# Altium PCB Beetech NanoEvery.PcbDoc
Units mm, origin at the board's own origin, x right, y up, seen from the top; angles counter-clockwise.
Board outline 90 x 57 mm, 2 copper layers (Top Layer, Bottom Layer), stack 1.671 mm thick; 33 components, 41 nets, 183 pads, 7 vias.
Unrouted connection lines stored in the file: 254.
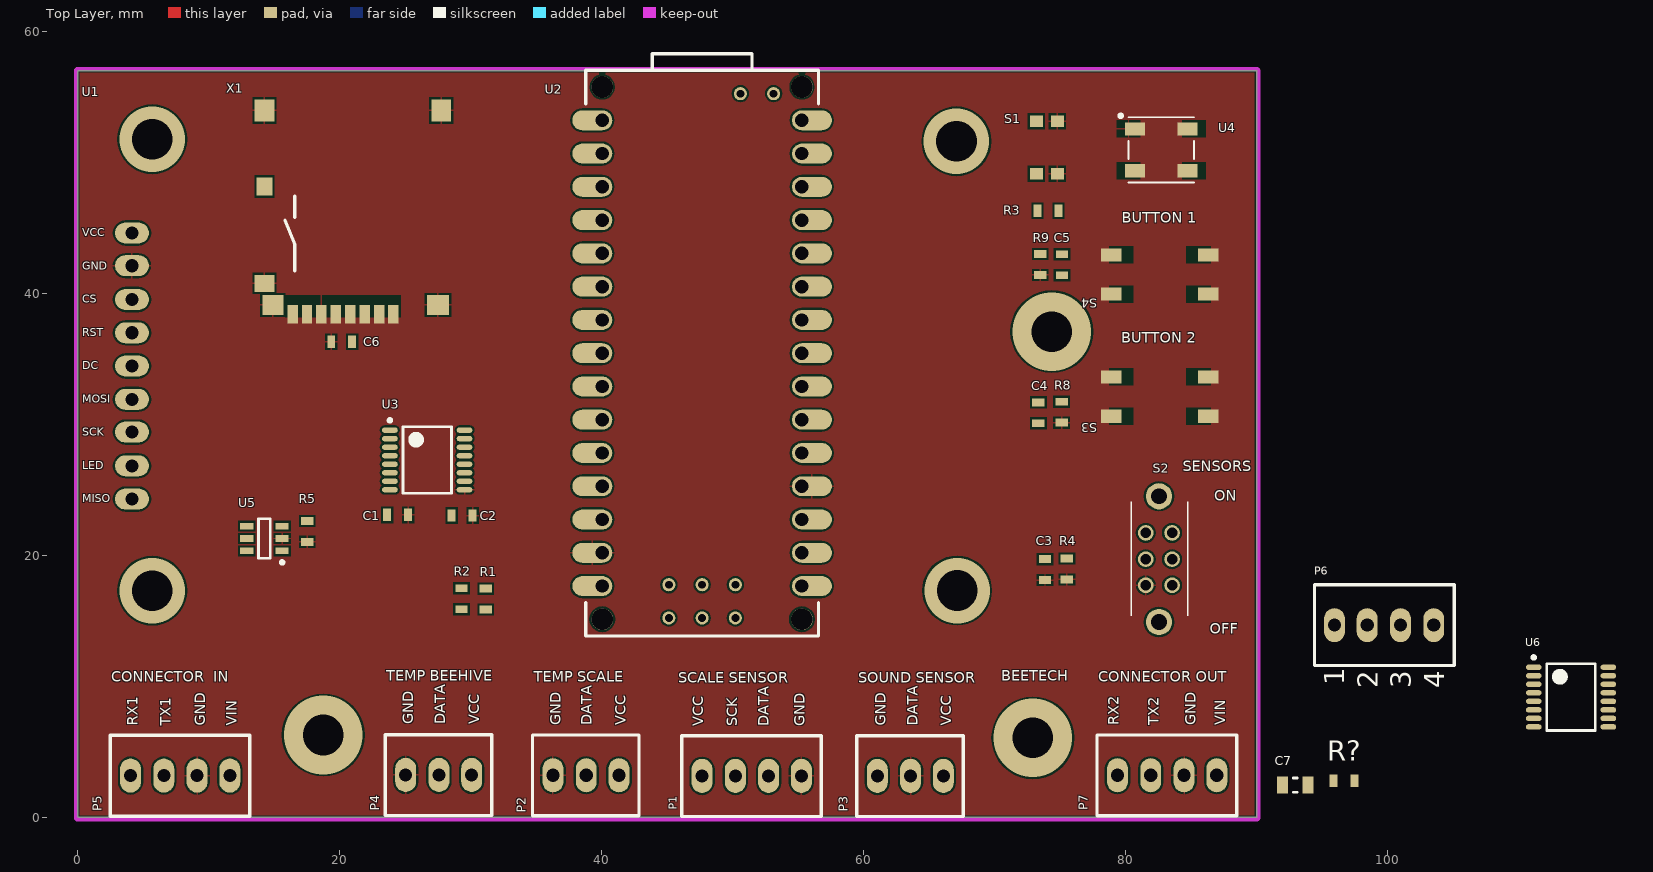
[diagram p0: Top Layer view]
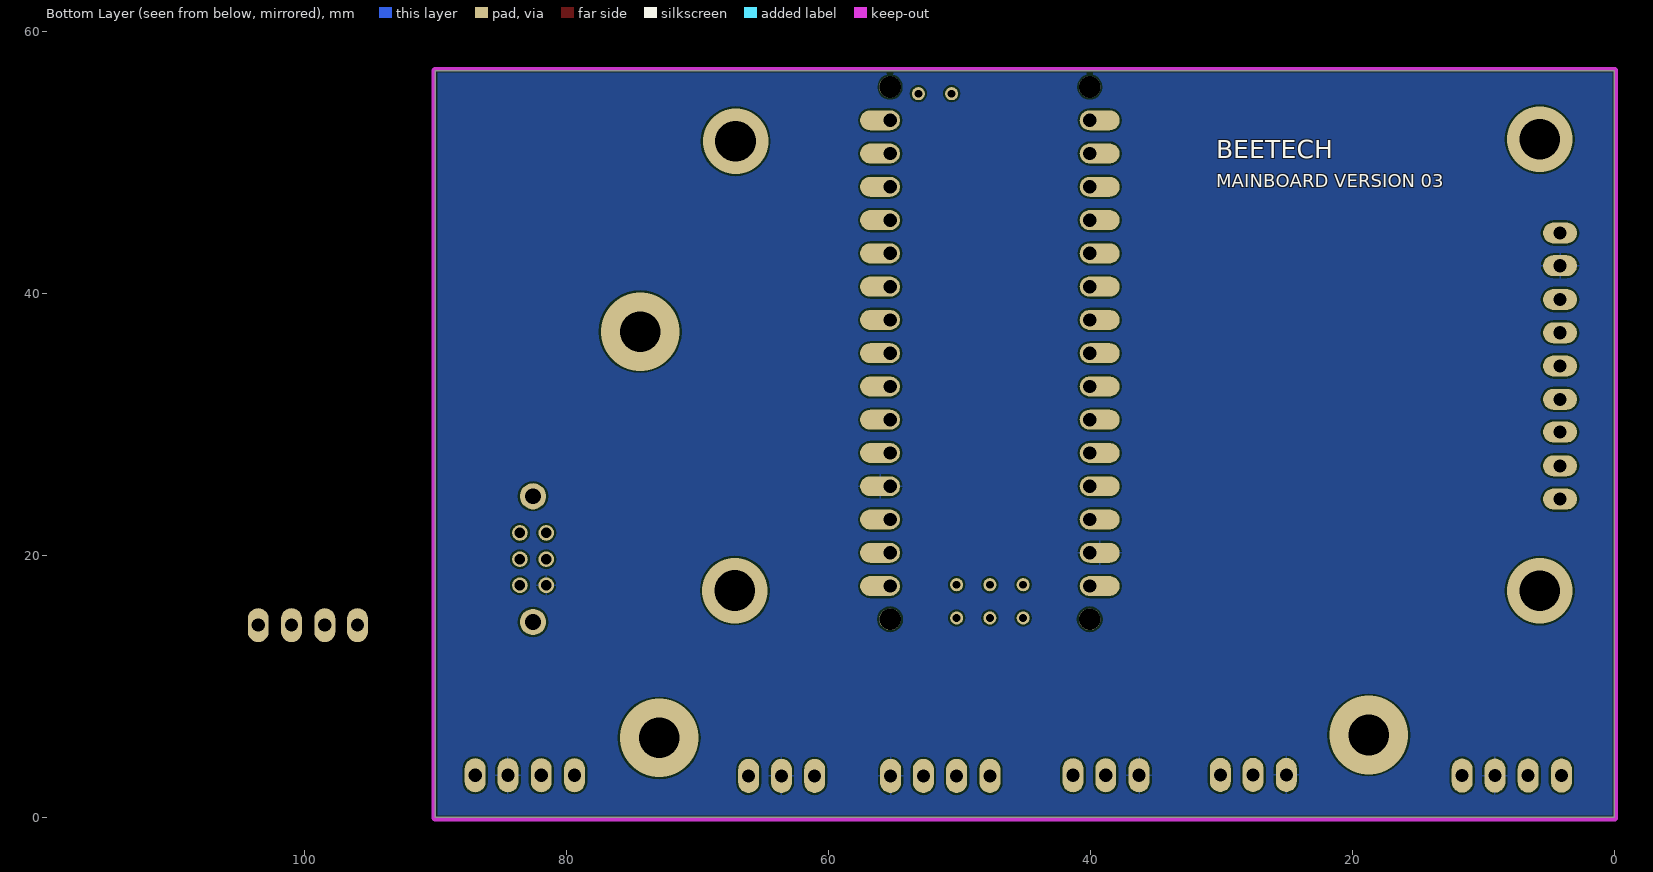
[diagram p1: Bottom Layer view, seen from below]

## Layer stack, top to bottom
Top Solder: solder mask 0.0102, Solder Resist, Dk 3.5
Top Layer: signal copper 0.0356
Dielectric1: core 1.6, FR-4, Dk 4.8
Bottom Layer: signal copper 0.0356
Bottom Solder: solder mask 0.0102, Solder Resist, Dk 3.5

## Board outline
0,0 90,0 90,57 0,57

## Design rules (kind name [scope] priority, off if disabled: settings)
Clearance Clearance_1 [InNamedPolygon('SW_L01_P024')] p1: gap=0.254 ignorepadtopadclearanceinfootprint=FALSE except(0: Arc-Hole Track-Hole SMDPad-Hole THPad-Hole Via-Hole Fill-Hole Poly-Hole Region-Hole Text-Hole)
Clearance [All] p2: gap=0.15 ignorepadtopadclearanceinfootprint=FALSE
ComponentClearance [All] p1: gap=0.001 collisioncheckmode=3 verticalgap=0.254 showdistances=FALSE
FabricationTestPointUsage [All] p1 off: valid=0 allowmultiple=FALSE
FabricationTestpoint [All] p1 off: side=3 testpointundercomponent=TRUE minsize=1.016 maxsize=2.54 preferedsize=1.524 minholesize=0 maxholesize=1.016 preferedholesize=0.813 testpointgrid=0.025 allowsidetop=TRUE allowsidebottom=TRUE usegrid=TRUE gridtolerance=0
HoleSize [All] p1: absolutevalues=TRUE maxlimit=6 minlimit=0.025 maxpercent=80.000 minpercent=20.000
HoleToHoleClearance [All] p1: gap=0 allowstackedmicrovias=TRUE
MinimumSolderMaskSliver [All] p1: minsoldermaskwidth=0
PolygonConnect PolygonConnect_14 [All vs IsNamedPolygon('GND_L01_P041')] p1: connectstyle=Relief reliefconductorwidth=0.15 reliefentries=4 polygonreliefangle="90 Angle" airgapwidth=0.15
PolygonConnect V_BAT_L01_P036 [All vs IsNamedPolygon('V_BAT_L01_P036')] p2: connectstyle=Direct reliefconductorwidth=0.254 reliefentries=4 polygonreliefangle="90 Angle" airgapwidth=0.254
PolygonConnect V_BAT2 [All vs IsNamedPolygon('V_BAT2_L01_P004')] p3: connectstyle=Direct reliefconductorwidth=0.254 reliefentries=4 polygonreliefangle="90 Angle" airgapwidth=0.254
PolygonConnect V_BAT [All vs IsNamedPolygon('V_BAT_L01_P010')] p4: connectstyle=Direct reliefconductorwidth=0.254 reliefentries=4 polygonreliefangle="90 Angle" airgapwidth=0.254
PolygonConnect V_SYS2 [All vs IsNamedPolygon('V_SYS2_L01_P012')] p5: connectstyle=Direct reliefconductorwidth=0.254 reliefentries=4 polygonreliefangle="90 Angle" airgapwidth=0.254
PolygonConnect +3.3b_uBlox [All vs IsNamedPolygon('+3.3V_UBLOX_L01_P014')] p6: connectstyle=Direct reliefconductorwidth=0.254 reliefentries=4 polygonreliefangle="90 Angle" airgapwidth=0.254
PolygonConnect V_LIPO_SYS_L01_P016 [All vs IsNamedPolygon('V_LIPO_SYS_L01_P016')] p7: connectstyle=Direct reliefconductorwidth=0.254 reliefentries=4 polygonreliefangle="90 Angle" airgapwidth=0.254
PolygonConnect V_LIPO_SYS_L01_P020 [All vs IsNamedPolygon('V_LIPO_SYS_L02_P020')] p8: connectstyle=Direct reliefconductorwidth=0.254 reliefentries=4 polygonreliefangle="90 Angle" airgapwidth=0.254
PolygonConnect V_SYS_L02_P024 [All vs IsNamedPolygon('V_SYS_L02_P024')] p9: connectstyle=Direct reliefconductorwidth=0.254 reliefentries=4 polygonreliefangle="90 Angle" airgapwidth=0.254
PolygonConnect VCC_USB_5.0V_L01_P026 [All vs IsNamedPolygon('VCC_USB_5.0V_L01_P026')] p10: connectstyle=Direct reliefconductorwidth=0.254 reliefentries=4 polygonreliefangle="90 Angle" airgapwidth=0.254
PolygonConnect SW [All vs IsNamedPolygon('SW_L01_P008')] p11: connectstyle=Direct reliefconductorwidth=0.254 reliefentries=4 polygonreliefangle="90 Angle" airgapwidth=0.254
PolygonConnect [All] p12: connectstyle=Relief reliefconductorwidth=0.15 reliefentries=4 polygonreliefangle="90 Angle" airgapwidth=0.15
RoutingVias [All] p1: holewidth=0.3 width=0.5 viastyle="Through Hole" minholewidth=0.2 minwidth=0.3 maxholewidth=1.2 maxwidth=2 useviatemplates=TRUE viatemplateguid#1={68F519FB-439D-452A-8ACF-2DE296BA9197} viatemplateguid#2={5ED9683F-E5DF-4E78-BDB1-49E541A8EC46} viatemplateguid#3={FAFF2F81-81C9-46E2-9D3D-D8AEF9417303} viatemplateguid#4={175E6F9D-763D-42D4-A59E-C21ACC7DA2E1} viatemplatename#1=v50h30m0mx0 viatemplatename#2=v50h30m50mx0 viatemplatename#3=v50h20 viatemplatename#4=v50h20mx0
SilkToSilkClearance [All] p1: silktosilkclearance=0.152
SilkToSolderMaskClearance [IsPad] p1: minsilkscreentomaskgap=0.127 clearancetoexposedcopper=TRUE
SolderMaskExpansion [All] p1: expansion=0.102 istentingtop=FALSE
Width [All] p1: maxlimit=5.08 minlimit=0.01 preferedwidth=0.305 minimp=50.000000 maximp=50.000000 favimp=50.000000
22 further rules are at their usual default settings.

## Components (designator, comment, footprint, x,y, rotation, side; value= is the part's Value field where it differs from the comment)
C1 "100nF 0603_1" "CAP 0603" 24.424,23.106 r180 top value=100nF
C2 "100nF 0603_1" "CAP 0603" 29.349,23.055 r180 top value=100nF
C3 "100nF 0603" "CAP 0603" 73.85,18.925 r270 top value=100nF
C4 "100nF 0603" "CAP 0603" 73.348,30.895 r90 top value=100nF
C5 "100nF 0603" "CAP 0603" 75.149,42.202 r90 top value=100nF
C6 "10uF 0603" "CAP 0603" 20.151,36.325 r0 top value=10uF
C7 "100nF 0805" "CAP 0805" 92.957,2.464 r0 top value=1uF
P1 "4-Pin Right Angle Housing" "4PIN - RND 205-EK254-2.54-04P" 55.25,3.175 r270 top
P2 "3-Pin Right Angle Housing" "3PIN - RND 205-EK254-2.54-03P" 41.325,3.225 r270 top
P3 "3-Pin Right Angle Housing" "3PIN - RND 205-EK254-2.54-03P" 66.09,3.175 r270 top
P4 "3-Pin Right Angle Housing" "3PIN - RND 205-EK254-2.54-03P" 30.078,3.25 r270 top
P5 "4-Pin Right Angle Housing" "4PIN - RND 205-EK254-2.54-04P" 11.615,3.2 r270 top
P6 "4-Pin Right Angle Housing" "4PIN - RND 205-EK254-2.54-04P" 95.95,14.681 r90 top
P7 "4-Pin Right Angle Housing" "4PIN - RND 205-EK254-2.54-04P" 86.965,3.225 r270 top
R1 "4.7k Ohm 0603" "RES 0603 FOOTPRINT" 31.15,16.675 r270 top value=4.7k
R2 "4.7k Ohm 0603" "RES 0603 FOOTPRINT" 29.3,16.7 r270 top value=4.7k
R3 "470 Ohm 0603" "RES 0603 FOOTPRINT" 74.075,46.325 r0 top value=470
R4 "1k Ohm 0603" "RES 0603 FOOTPRINT" 75.525,18.978 r90 top value=1k
R5 "47k Ohm 0603" "RES 0603 FOOTPRINT" 17.526,21.844 r90 top value=47k
R8 "10k Ohm 0603" "RES 0603 FOOTPRINT" 75.123,30.945 r90 top value=10k
R9 "10k Ohm 0603" "RES 0603 FOOTPRINT" 73.489,42.22 r90 top value=10k
R? "20k Ohm 0603" "RES 0603 FOOTPRINT" 96.672,2.794 r0 top value=20k
S1 "Taster Print_SMD_2" "Taster Print - SMD - KMR241G LFS" 73.989,51.15 r270 top
S2 "Schiebeschalter EG2207" "Schiebeschalter on-on 2 P, EG2207" 82.55,19.725 r90 top
S3 "Taster Print_SMD_3" "Taster Print - SMD - PTS647SM70SMTR2LFS" 82.616,32.134 r180 top
S4 "Taster Print_SMD_3" "Taster Print - SMD - PTS647SM70SMTR2LFS" 82.616,41.456 r180 top
U1 "TFT 2.2 SPI 240x320" "TFT 2.2 SPI 240x320" 4.14,44.628 r0 top locked
U2 "Arduino Nano Every" "Arduino Nano Every" 38.78,57.04 r270 top locked
U3 "TXB0106" TSSOP-16L 26.685,27.297 r0 top
U4 "neoPixel" "neoPixel 5050 adafruit 1655" 82.725,50.975 r180 top
U5 "TPS22917DBVT" "SOT23 - 6" 14.255,21.3 r180 top
U6 "TXB0106" TSSOP-16L 114.014,9.195 r0 top
X1 "SD micro Card Holder_2" "SD Card Holder - micro - 2 - sd Card inserted" 15.005,54.83 r0 top locked

## Footprints (in the part's own frame and the unit in brackets; to place one, negate y for a bottom-side part, rotate by r counter-clockwise, add the part's x,y. Pads: shape width x height; smd on the part's side, far side on the other; paste and mask are expansions set on the pad)
"3PIN - RND 205-EK254-2.54-03P" [mm] "RND 205-EK254-2.54-03P"
  oval 2.6x1.6 hole 1: 1(0,0) 2(0,-2.5) 3(0,-5.04)
  silkscreen extent -3.07,-6.6 3.1,1.52, body extent -3.1,-6.55 3.1,1.53, height 8.51
"4PIN - RND 205-EK254-2.54-04P" [mm] "RND 205-EK254-2.54-04P"
  oval 2.6x1.6 hole 1: 1(0,0) 2(0,-2.5) 3(0,-5.04) 4(0,-7.58)
  silkscreen extent -3.07,-9.14 3.1,1.52, body extent -3.1,-9.1 3.1,1.52, height 8.51
"Arduino Nano Every" [mil] "Arduino Nano Every"
  oval 60x120 hole 40 copper offset 0,-30: 1(150,50) 2(250,50) 3(350,50) 4(450,50) 5(550,50) 6(650,50) 7(750,50) 8(850,50) 9(950,50) 10(1050,50) 11(1150,50) 12(1250,50) 13(1350,50) 14(1450,50) 15(1550,50)
  oval 60x120 hole 40 copper offset 0,30: 16(1550,650) 16(1550,650) 17(1450,650) 18(1350,650) 19(1250,650) 20(1150,650) 21(1050,650) 22(950,650) 23(850,650) 24(750,650) 25(650,650) 26(550,650) 27(450,650) 28(350,650) 29(250,650) 30(150,650)
  round 39.37 hole 23.62: 50(70,565) 51(70,465) 61(1545.98,250) 62(1645.98,250) 63(1545.98,350) 64(1645.98,350) 65(1545.98,450) 66(1645.98,450)
  round 65 hole 65 unplated: MH1(50,650) MH2(50,50) MH3(1650,50) MH4(1650,650)
  silkscreen extent -50,0 1700,700, body extent -40,0 1700,700, height 136
"CAP 0603" [mm] "CAP 0603"
  rect 0.6x0.95 smd: 1(-0.8,0) 2(0.8,0)
  body extent -0.8,-0.4 0.8,0.4, height 0.8
"CAP 0805" [mm] "CAP 0805"
  rect 0.85x1.3 smd: 1(-0.975,0) 2(0.975,0)
  silkscreen extent -0.15,-0.55 0.15,0.55, body extent -1,-0.63 1,0.63, height 0.65
"neoPixel 5050 adafruit 1655" [mm] "neoPixel 5050 adafruit 1655"
  rect 1.5x1 smd: 1(2,-1.6) 2(2,1.6) 3(-2,1.6) 4(-2,-1.6)
  silkscreen extent -2.5,-2.72 3.22,2.5, body extent -2.5,-2.5 2.5,2.5, height 2
"RES 0603 FOOTPRINT" [mm] "RES 0603 FOOTPRINT"
  rect 0.6x0.95 smd: 1(-0.8,0) 2(0.8,0)
  body extent -0.8,-0.4 0.8,0.4, height 0.8
"Schiebeschalter on-on 2 P, EG2207" [mm] "Schiebeschalter on-on 2 P, EG2207"
  round 1.2 hole 0.8: 1(-2,1) 2(0,1) 3(2,1) 4(-2,-1) 5(0,-1) 6(2,-1)
  round 2 hole 1.2: 10(-4.8,0) 10(4.8,0)
  silkscreen extent -4.33,-2.2 4.37,2.1, body extent -4.98,-3.05 5.02,2.95, height 7.7
"SD Card Holder - micro - 2 - sd Card inserted" [mm] "micro SD Card holder, Molex Part Number:   502774-0891"
  rect 0.8x1.4 smd: 1(9.1,-16.4) 2(8,-16.4) 3(6.9,-16.4) 4(5.8,-16.4) 5(4.7,-16.4) 6(3.6,-16.4) 7(2.5,-16.4) 8(1.4,-16.4)
  rect 1.2x1.4 smd: 10(-0.75,-6.65)
  rect 1.5x1.3 smd: 20(-0.75,-14.05)
  rect 1.5x1.7 smd: 20(-0.75,-0.85) 20(12.75,-0.85)
  rect 1.6x1.5 smd: 20(-0.1,-15.7)
  rect 1.7x1.5 smd: 20(12.5,-15.7)
  silkscreen extent 0.82,-13.08 1.57,-7.37, body extent -1,-16.1 13.3,2.2, height 1.81
"SOT23 - 6" [mm] "SOT23, 6-Leads, Body 2,90x2,80mm, Pitch 0,95mm, IPC Medium Density"
  rect 1x0.5 smd: 1(-1.35,0.95) 2(-1.35,0) 3(-1.35,-0.95) 4(1.35,-0.95) 5(1.35,0) 6(1.35,0.95)
  silkscreen extent -1.48,-1.5 0.45,1.95, body extent -0.85,-1.5 0.85,1.5, height 1.1
"Taster Print - SMD - KMR241G LFS" [mm] "http://ch.farnell.com/c-k-components/kmr241g-lfs/taster-smd-4n/dp/1437637"
  rect 0.9x1 smd: 1(-2,0.8) 2(-2,-0.8) 10(2,0.8) 20(2,-0.8)
  body extent -2.3,-1.4 2.3,1.4, height 1.93
"Taster Print - SMD - PTS647SM70SMTR2LFS" [mm] "https://www.mouser.ch/ProductDetail/CK/PTS647SM70SMTR2LFS?qs=PqoDHHvF64%252Bxl5nIb9IaOw%3D%3D"
  rect 1.55x1 smd: 1(3.7,1.5) 2(-3.7,1.5) 3(3.7,-1.5) 4(-3.7,-1.5)
  body extent -3.28,-2.22 3.22,2.28, height 7.2
"TFT 2.2 SPI 240x320" [mm]
  oval 2.6x1.6 hole 1: 1(0,0) 2(0,-2.5) 3(0,-5.08) 4(0,-7.62) 5(0,-10.16) 6(0,-12.7) 7(0,-15.2) 8(0,-17.78) 9(0,-20.32)
  body extent -1.52,-30.16 65.98,9.84, height 14.41
TSSOP-16L [mm] "TSOP, 16-Leads, Body 5,00x4,40mm, Pitch 0,65mm, IPC High Density"
  oval 1.2x0.4 smd: 1(-2.85,2.275) 2(-2.85,1.625) 3(-2.85,0.975) 4(-2.85,0.325) 5(-2.85,-0.325) 6(-2.85,-0.975) 7(-2.85,-1.625) 8(-2.85,-2.275) 9(2.85,-2.275) 10(2.85,-1.625) 11(2.85,-0.975) 12(2.85,-0.325) 13(2.85,0.325) 14(2.85,0.975) 15(2.85,1.625) 16(2.85,2.275)
  silkscreen extent -2.97,-2.55 1.85,3.15, body extent -2.25,-2.55 2.25,2.55, height 1.2

## Part data
C1 C2 C3 C4 C5 C6 C7: "C CERAMIC SMD", Bezeichnung="C SMD"
  C1 C2: Haendler=Mouser, Haendler Nr=603-CC0603JPX79BB104, Hersteller=Yageo, Hersteller Nr=CC0603JPX7R9BB104, housing/footprint=0603, Preis (CHF)=0.15, Umax=50V
  C3 C4 C5: Haendler=Mouser, Haendler Nr=710-885012206020, Hersteller=Würth, Hersteller Nr=885012206020, housing/footprint=0603, Preis (CHF)=0.05, Umax=10V
  C6: Dielektrikum=X5R, Haendler=Mouser, Haendler Nr=810-C1608X5R1A106K, Hersteller=TDK, Hersteller Nr=C1608X5R1A106K080AC, housing/footprint=0603, Preis (CHF)=0.5, Umax=10V
  C7: Haendler=Farnell, Haendler Nr=2496946, housing/footprint=0805, Preis (CHF)=0.0126
P1 P5 P6 P7: library part "4-Pin Screw Terminal", "4-Pin", ComponentLink1Description=Mouser, ComponentLink1URL=https://www.mouser.ch/ProductDetail/TE-Connectivity/640453-2?qs=sGAEpiMZZMs%252bGHln7q6pm5E1Eb6qwPl2KIU5TYv3tVY%3d, Haendler=Distrelec, Haendler Nr=301-27-920, Hersteller=RND, Hersteller Nr="RND 205-EK254-2.54-04P", Preis (CHF)=0.60
P2 P3 P4: library part "3-Pin Screw Terminal", "3-Pin", ComponentLink1Description=Mouser, ComponentLink1URL=https://www.mouser.ch/ProductDetail/TE-Connectivity/640453-2?qs=sGAEpiMZZMs%252bGHln7q6pm5E1Eb6qwPl2KIU5TYv3tVY%3d, Haendler=Distrelec, Haendler Nr=301-27-919, Preis (CHF)=0.60
R1 R2 R3 R4 R5 R8 R9 R?: "R SMD", Bezeichnung="R SMD", Haendler=Mouser, housing/footprint=0603
  R1 R2: Haendler Nr=755-ESR03EZPF4701, Preis (CHF)=0.01
  R3: Haendler Nr=594-MCT06030C4700FP5, Preis (CHF)=0.15
  R4: Haendler Nr=71-CRCW06031K00FKEAC, Hersteller Nr=CRCW06031K00FKEAC, Preis (CHF)=0.01
  R5: Haendler Nr=603-AC0603FR-0747KL, Hersteller=Yageo, Hersteller Nr=AC0603FR-0747KL, Preis (CHF)=0.01
  R8 R9: Haendler Nr=603-AC0603FR-0710KL, Hersteller=Yageo, Hersteller Nr=AC0603FR-0710KL, Preis (CHF)=0.01
  R?: Haendler Nr=71-CRCW060320K0FKEAC, Preis (CHF)=0.09
S1: "Taster", Haendler=Mouser, Haendler2=Farnell, Haendler2 Nr=1437637, Haendler Nr=611-KMR241GLFS, Hersteller=C&K, Hersteller Nr="KMR241G LFS", link=http://ch.farnell.com/c-k-components/kmr241g-lfs/taster-smd-4n/dp/1437637, Link Hersteller=http://www.ckswitches.com/products/switches/product-details/Tactile/KMR2/KMR241NGLFS/, Preis (CHF)=0.5
S2: "Schiebeschalter on-on PCM12SMTR", ComponentLink1Description=C&K, ComponentLink1URL=https://www.ckswitches.com/products/switches/product-details/Slide/AYZ/AYZ0202AGRLC/, Haendler=Mouser, Haendler Nr=612-EG2207, Hersteller="E SWITCH", Hersteller Nr=EG2207, Preis (CHF)=0.66
S3 S4: library part "Taster Print_SMD_6", "Taster", ComponentLink1Description=link, ComponentLink1URL=https://www.digikey.ch/product-detail/de/wurth-electronics-inc/430473035826/732-7021-1-ND/5225469, Haendler=Mouser, Haendler Nr=611-PTS647SM70SMTR2L, link=https://www.mouser.ch/ProductDetail/CK/PTS647SM70SMTR2LFS?qs=PqoDHHvF64%252Bxl5nIb9IaOw%3D%3D, Preis (CHF)=0.38
U1: "https://www.banggood.com/1_441_82_02_22_4-Inch-TFT-LCD-Display-Module-Colorful-Screen-Module-SPI-Interface-p-1494883.html?rmmds=search&ID=6211522&cur_warehouse=CN", ComponentLink3URL=http://ch.farnell.com/stmicroelectronics/stm32l496vgt6/mcu-arm-cortex-m4-80mhz-lqfp-100/dp/2725139?st=STM32L496VGT6, Haendler="Banggood / Aliexpress", link=https://www.banggood.com/1_441_82_02_22_4-Inch-TFT-LCD-Display-Module-Colorful-Screen-Module-SPI-Interface-p-1494883.html?rmmds=search&ID=6211522&cur_warehouse=CN, Link 2=https://de.aliexpress.com/item/4000839144387.html?spm=a2g0o.productlist.0.0.48ed5371jjv3wJ&algo_pvid=f087815a-197e-468a-8055-d99fc6734484&algo_expid=f087815a-197e-468a-8055-d99fc6734484-8&btsid=0ab50f6115912653966648062e4a8e&ws_ab_test=searchweb0_0,searchweb201602_,searchweb201603_, Preis (CHF)=6
U2: "https://store.arduino.cc/nano-every-pack", ComponentLink3URL=http://ch.farnell.com/stmicroelectronics/stm32l496vgt6/mcu-arm-cortex-m4-80mhz-lqfp-100/dp/2725139?st=STM32L496VGT6, Haendler=Mouser, Haendler Nr=782-ABX00028, link=https://store.arduino.cc/nano-every-pack, Link 2=https://www.mouser.ch/ProductDetail/Arduino/ABX00028?qs=PzGy0jfpSMtit6rnFl8mVg%3D%3D, Preis (CHF)=11.21
U3 U6: library part "TXB0106 Level Converter", "Level Converter TXB0106", Haendler=Mouser, Haendler2=Farnell, Haendler2 Nr=1694679, Haendler Nr=595-TXB0106PWR, Hersteller="Texas Instruments", Hersteller Nr=TXB0106, link=http://ch.farnell.com/texas-instruments/txb0106pwr/txb-transceiver-tssop16/dp/1694679?ost=1694679&searchView=table&iscrfnonsku=false&ddkey=http%3Ade-CH%2FElement14_Switzerland%2Fsearch, Preis (CHF)=1.45
U4: library part "neoPixel 5050 adafruit 1655", "neoPixel 5050 adafruit 1655", ComponentLink1Description=Mouser, ComponentLink1URL=https://www.mouser.ch/ProductDetail/TE-Connectivity/640453-2?qs=sGAEpiMZZMs%252bGHln7q6pm5E1Eb6qwPl2KIU5TYv3tVY%3d, Haendler=Mouser, Haendler Nr=485-1655, Hersteller=Adafruit, Hersteller Nr=1655, Preis (CHF)=0.60
U5: "High Side Switch", Code_JEDEC="SOT 23-6", Haendler=Mouser, Haendler Nr=595-TPS22917DBVT, Hersteller=TI, Hersteller Nr=TPS22917DBVT, link=https://www.mouser.ch/ProductDetail/Texas-Instruments/TPS22917DBVT?qs=sGAEpiMZZMve4%2fbfQkoj%252bPJ2V24ZqG0%252bKgHGtqls2rU%3d, Preis (CHF)=0.6
X1: "SD micro Card  Holder", Haendler=Mouser, Haendler2=Farnell, Haendler2 Nr=2064063, Haendler Nr=538-502774-0891, Hersteller=Molex, Hersteller Nr=502774-0891, Preis (CHF)=3.15

## Via types
v1: diameter 5, hole 3.1, Top Layer to Bottom Layer, tented both sides, 4 vias
v2: diameter 6, hole 3.1, Top Layer to Bottom Layer, 3 vias

## Nets (pads, with @x,y where several pads share a name; then routed paths per layer and width w, separated by ;. In a path a pad name is that pad's centre, name@x,y a point inside that pad or via, vN(x,y) a via of type N, cw(c..) or ccw(c..) an arc to the next point about the centre after c; other vN are vias at no path point)
BUTTON_1: C4.2 R8.2 S3.3 S3.4 U2.3
BUTTON_2: C5.2 R9.2 S4.3 S4.4 U2.20
CS: U2.28 U3.16
"CS SD 5V": U2.21 U6.14
"CS SD CARD 3.3V": U6.3 X1.2
"CS TFT": U1.3 U3.1
DATA_TEMP_1: P2.2 R1.2 U2.25
DATA_TEMP_2: P4.2 R2.2 U2.24
DC: U2.27 U3.13
"DC TFT": U1.5 U3.4
DT_HX711: P1.2 U2.6
GND: C1.1 C2.1 C3.2 C6.1 P1.1 P2.3 P3.2 P4.3 P5.2 P6.2 P7.2 R4.1 R5.1 R8.1 R9.1 R?.1 S1.1 S1.10 S2.1 U1.2 U2.14 U2.19 U3.9 U4.1 U5.2 U6.9 X1.6 X1.20
"LED TFT": U1.8 U5.6
MISO: U2.30 U3.10
"MISO 3.3V": U3.7 X1.7
MOSI: U2.29 U3.12
"MOSI 3.3V": U1.6 U3.5 X1.3
NEO_PIX_DATA: R3.1 U2.11
NetC7_2: C7.2 P3.3 R?.2
NetR3_2: R3.2 U4.2
RESETN: S1.2 S1.20 U2.13
RST: U2.26 U3.14
"RST TFT": U1.4 U3.3
"RX 1": P5.4 U2.17
"RX 2": P7.4 U2.22
SCK: U2.1 U3.11
"SCK 3.3V": U1.7 U3.6 X1.5
SCK_HX711: P1.3 U2.7
"SCL 3.3V": P6.4 U6.7
"SCL 5V": U2.9 U6.10
"SDA 3.3V": P6.3 U6.6
"SDA 5V": U2.8 U6.11
SOUND_DATA: C7.1 U2.4
SWITCH: C3.1 R4.2 S2.2 U2.10
"TFT LED EN 3.3V": R5.2 U5.3 U6.1
"TFT LED ENABLE": U2.5 U6.16
"TX 1": P5.3 U2.16
"TX 2": P7.3 U2.23
"V IN": P5.1 P7.1 U2.15
"VCC 3.3V": C1.2 C6.2 P3.1 P6.1 U1.1 U2.2 U3.2 U3.8 U5.1 U6.2 U6.8 X1.4
"VCC 5V": C2.2 C4.1 C5.1 P1.4 P2.1 P4.1 R1.1 R2.1 S2.3 S3.1 S3.2 S4.1 S4.2 U2.12 U3.15 U4.3 U6.15
pads on no net: S2.4 S2.5 S2.6 S2.10 U1.9 U2.18 U2.50 U2.51 U2.61 U2.62 U2.63 U2.64 U2.65 U2.66 U2.MH1 U2.MH2 U2.MH3 U2.MH4 U4.4 U5.4 U5.5 U6.4 U6.5 U6.12 U6.13 X1.1 X1.8 X1.10
copper on no net:
  other v1: 5.69,17.318 67.14,17.328 67.09,51.628 5.69,51.788
  other v2: 72.925,6.073 18.75,6.298 74.375,37.1

## Polygon pours and split planes (outlines as drawn)
GND on Top Layer "GND_L01_P000" (solid, pour order 0): 0,0 90,0 90,57 0,57
GND on Bottom Layer "GND_L02_P001" (solid, pour order 1): 0,0 90,0 90,57 0,57

## Keep-outs
Keep-Out Layer:
  lines w0.3: -0.15,0 ccw(c0,0) 0,-0.15 ; -0.15,0 ccw(c0,0) 0,-0.15 ; -0.15,0 -0.15,57 ; -0.15,57 cw(c0,57) 0,57.15 ; -0.15,57 cw(c0,57) 0,57.15 ; 0,-0.15 90,-0.15 ; 0,57.15 90,57.15 ; 90,-0.15 ccw(c90,0) 90.15,0 ; 90,-0.15 ccw(c90,0) 90.15,0 ; 90,57.15 cw(c90,57) 90.15,57 ; 90,57.15 cw(c90,57) 90.15,57 ; 90.15,0 90.15,57

## Silkscreen, mask and mechanical layers (free items; w line width, h text height)
Top Overlay:
  text "BUTTON 1" at 79.725,45.425 h0.8
  text "BUTTON 2" at 79.675,36.25 h0.8
  text "SENSORS" at 84.352,26.425 h0.8
  text "ON" at 86.766,24.193 h0.8
  text "OFF" at 86.416,14.045 h0.8
  text "BEETECH" at 70.497,10.45 h0.8
  text "TEMP BEEHIVE" at 23.574,10.425 h0.8
  text "CONNECTOR  IN" at 2.571,10.375 h0.8
  text "TEMP SCALE" at 34.821,10.35 h0.8
  text "CONNECTOR OUT" at 77.921,10.35 h0.8
  text "SCALE SENSOR" at 45.831,10.275 h0.8
  text "SOUND SENSOR" at 59.586,10.3 h0.8
  text "GND" at 25.625,7.122 h0.8 r90
  text "DATA" at 28.05,7.122 h0.8 r90
  text "VCC" at 30.675,7.122 h0.8 r90
  text "GND" at 36.875,7.047 h0.8 r90
  text "DATA" at 39.23,7.047 h0.8 r90
  text "VCC" at 41.825,7.047 h0.8 r90
  text "RX2" at 79.485,7.047 h0.8 r90
  text "TX2" at 82.55,7.047 h0.8 r90
  text "GND" at 85.35,7.047 h0.8 r90
  text "VIN" at 87.625,7.047 h0.8 r90
  text "RX1" at 4.565,7.022 h0.8 r90
  text "TX1" at 7.115,7.022 h0.8 r90
  text "GND" at 9.74,7.022 h0.8 r90
  text "VIN" at 12.14,7.022 h0.8 r90
  text "GND" at 61.675,6.997 h0.8 r90
  text "DATA" at 64.15,6.997 h0.8 r90
  text "VCC" at 66.7,6.997 h0.8 r90
  text "VCC" at 47.775,6.972 h0.8 r90
  text "SCK" at 50.35,6.972 h0.8 r90
  text "DATA" at 52.775,6.972 h0.8 r90
  text "GND" at 55.5,6.972 h0.8 r90
Bottom Overlay:
  text "BEETECH" at 30.387,50.35 h1.4
  text "MAINBOARD VERSION 03" at 30.382,48.104 h1

## Text inside footprints (layer, text, board x,y; h text height)
P6: Top Overlay "4" at 104.332,9.855 h1.52 r90; Top Overlay "3" at 101.792,9.855 h1.52 r90; Top Overlay "2" at 99.252,9.855 h1.52 r90; Top Overlay "1" at 96.712,10.109 h1.52 r90
U1: Top Overlay "DC" at 0.33,34.214 h0.6; Top Overlay "RST" at 0.33,36.754 h0.6; Top Overlay "VCC" at 0.33,44.374 h0.6; Top Overlay "GND" at 0.33,41.834 h0.6; Top Overlay "CS" at 0.33,39.294 h0.6; Top Overlay "LED" at 0.33,26.594 h0.6; Top Overlay "SCK" at 0.33,29.134 h0.6; Top Overlay "MOSI" at 0.33,31.674 h0.6; Top Overlay "MISO" at 0.33,24.054 h0.6